# Altium PCB Keo_truot_cua_tu_6_sensor_2_PCB.PcbDoc
Units mil, origin at the board's own origin, x right, y up, seen from the top; angles counter-clockwise.
Board outline 2118.11 x 1291.34 mil, 2 copper layers (Top Layer, Bottom Layer); 41 components, 42 nets, 169 pads, 62 vias.
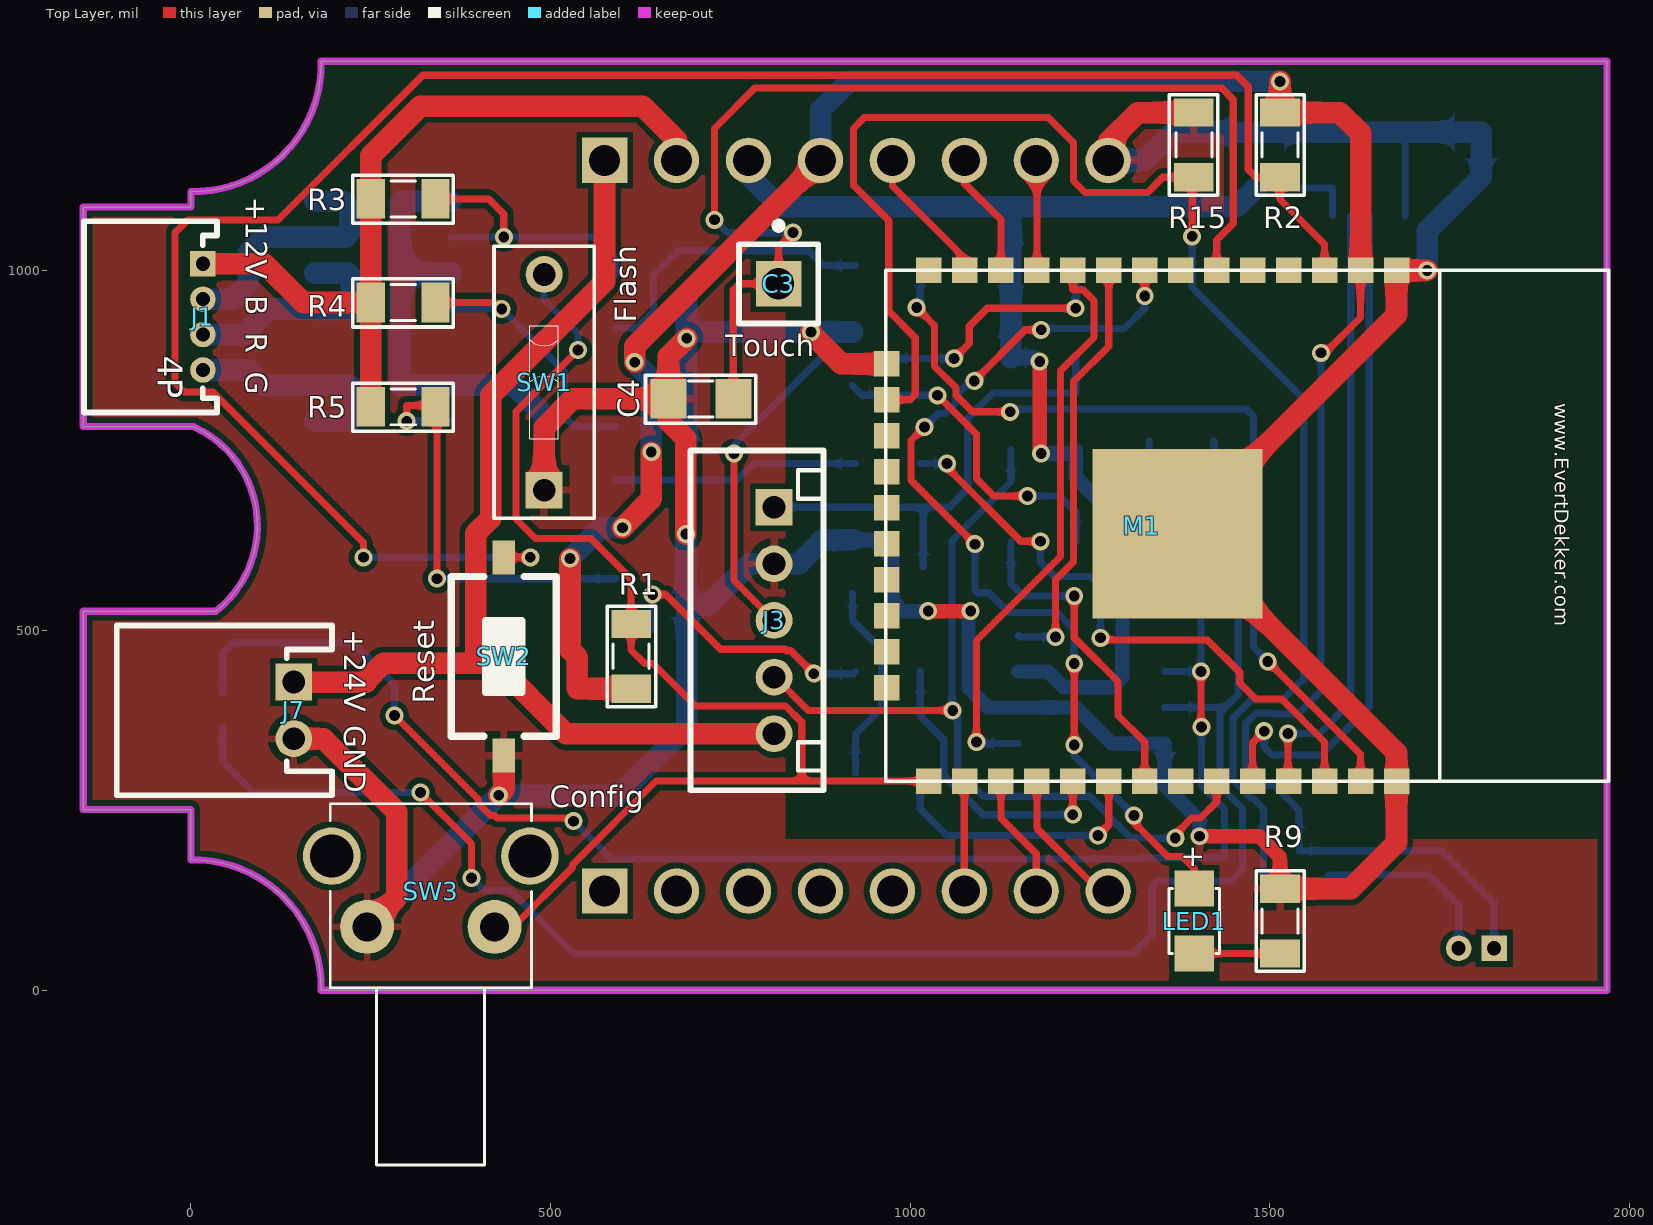
[diagram p0: Top Layer view]
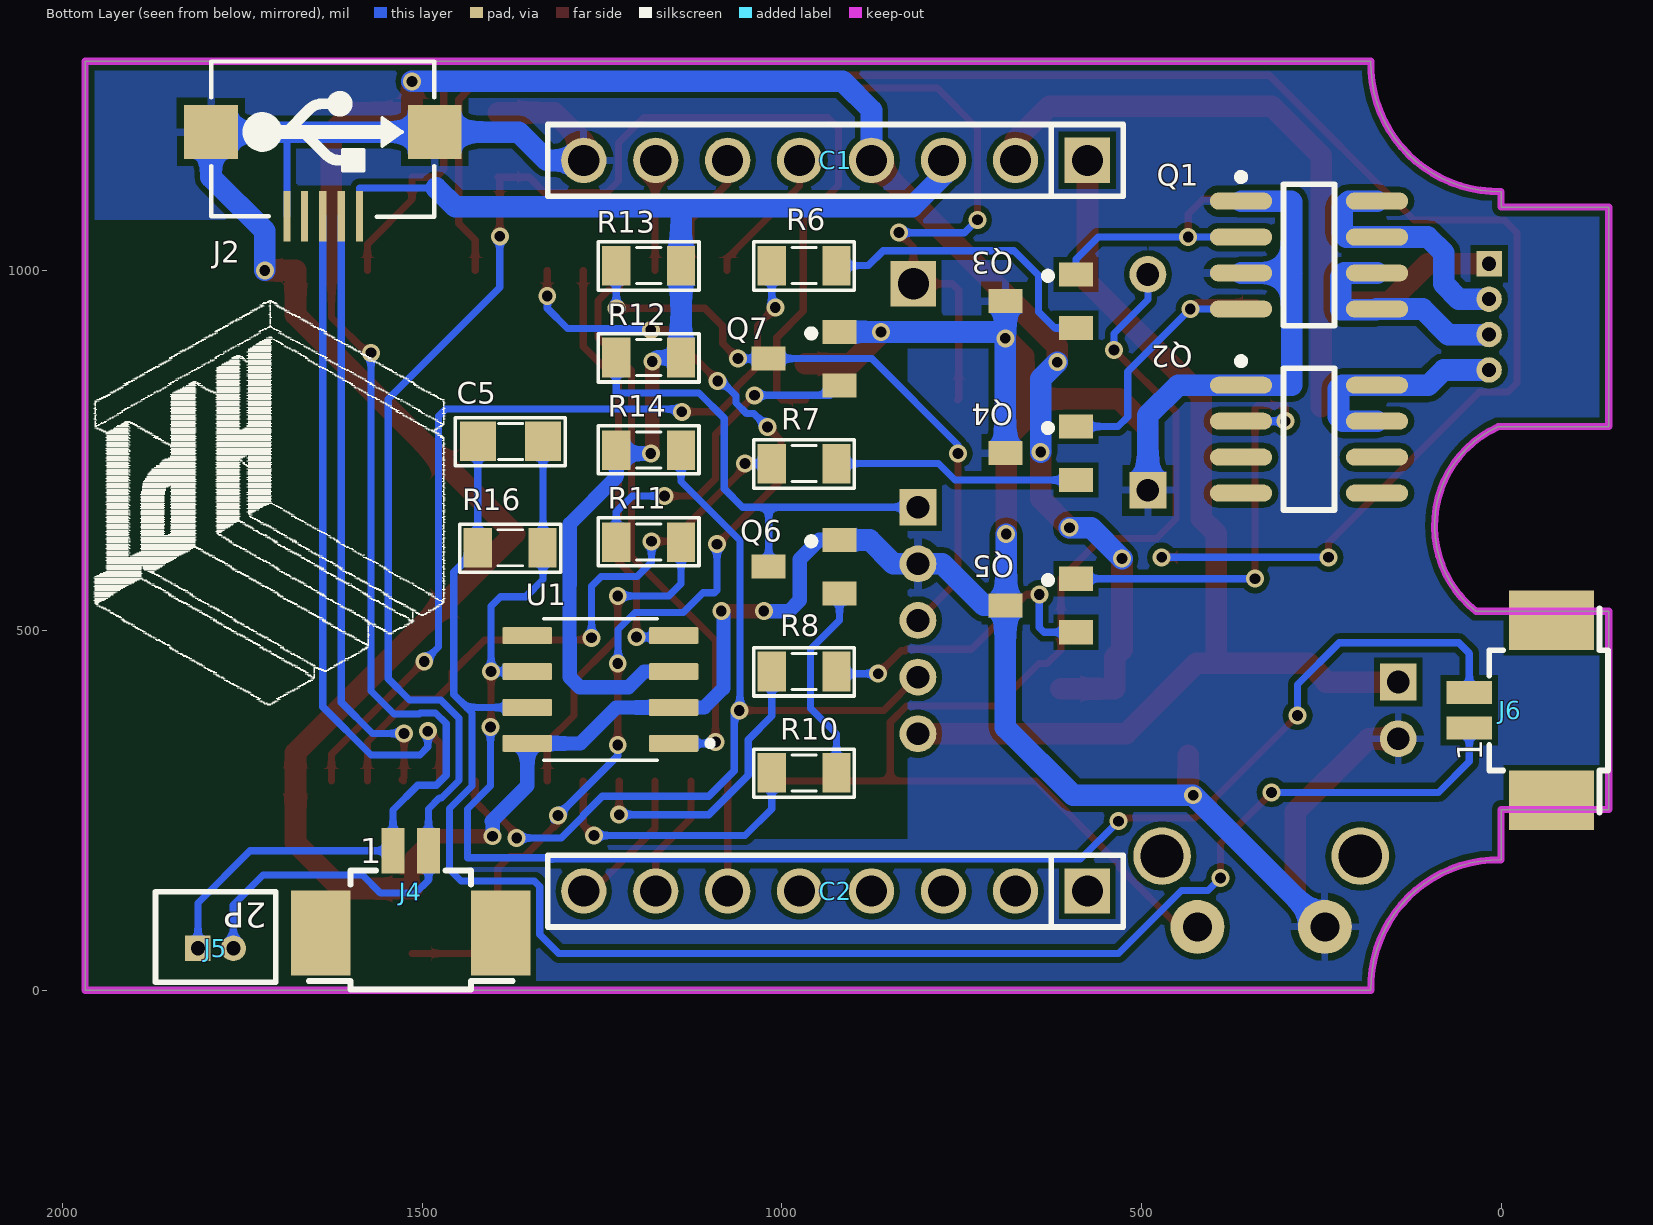
[diagram p1: Bottom Layer view, seen from below]
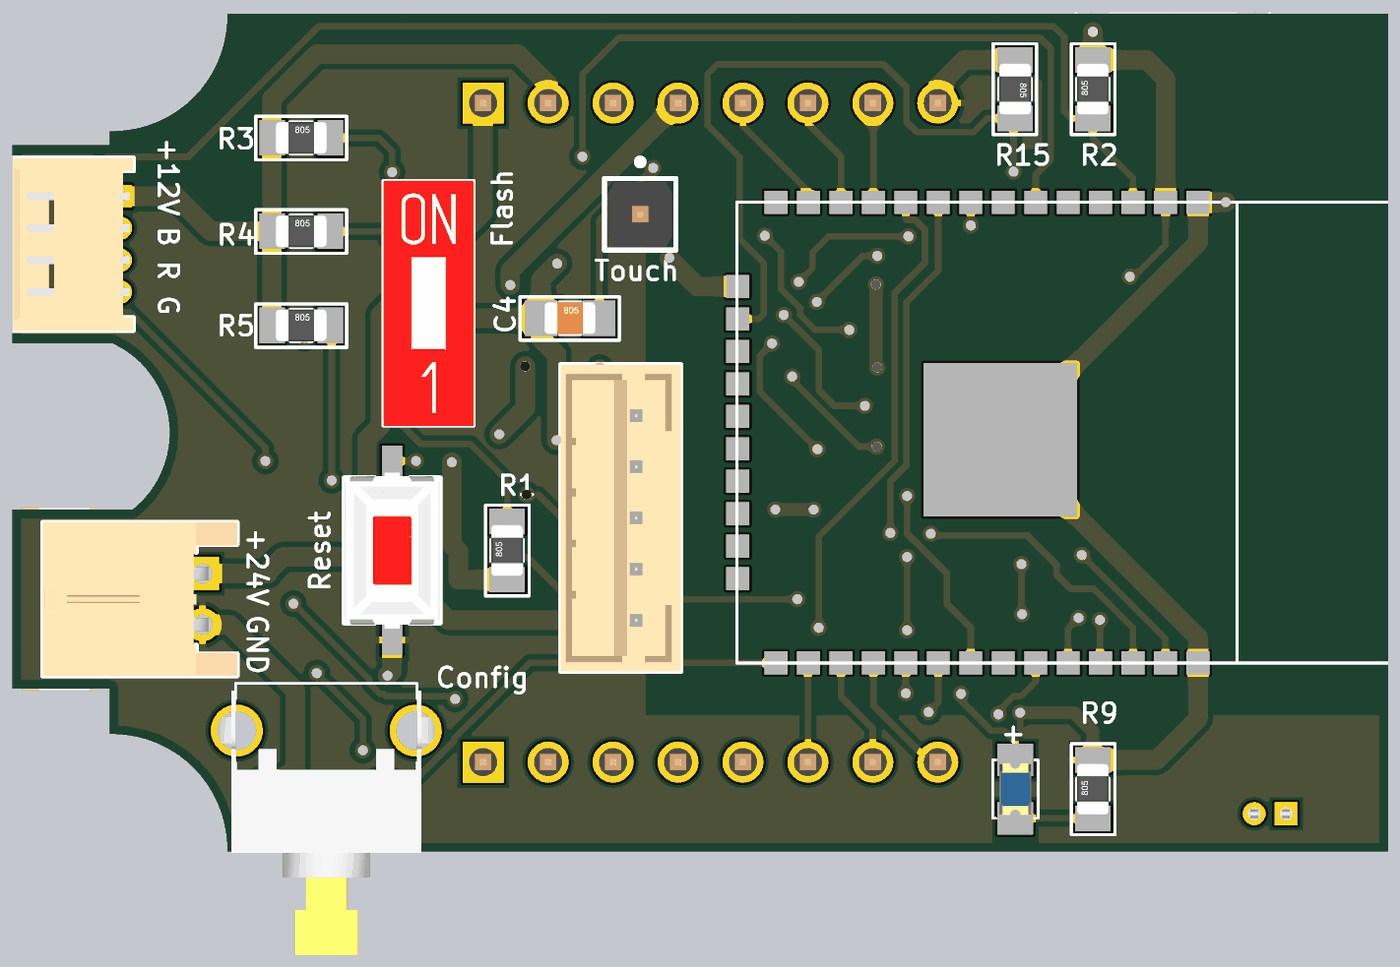
[diagram p2: 3D render of the assembled board from above, using the file's embedded part models]
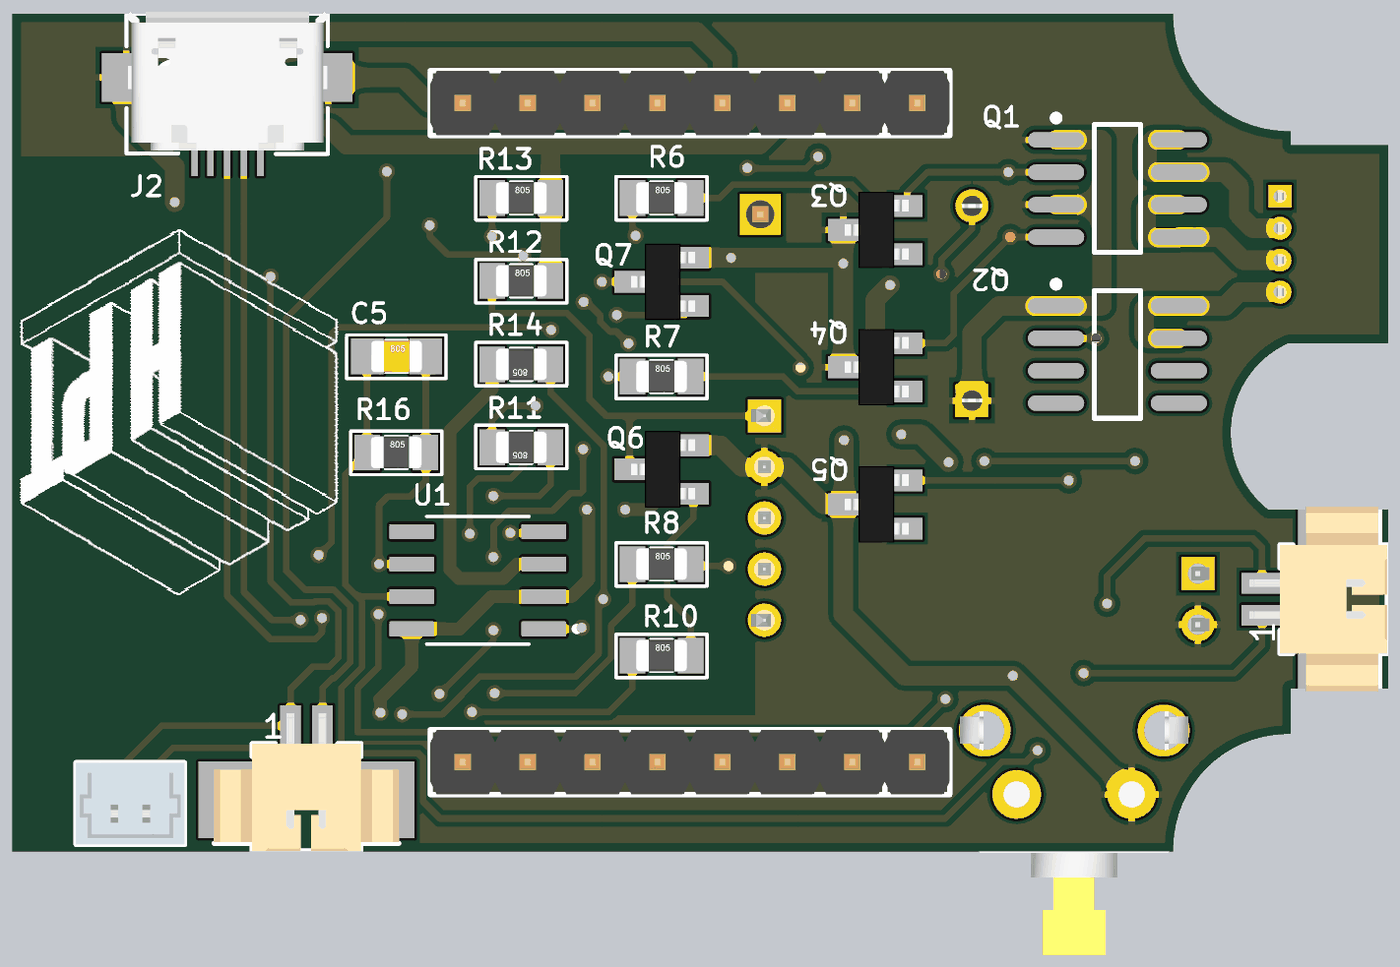
[diagram p3: 3D render of the assembled board from below, using the file's embedded part models]

## Layer stack, top to bottom
Top Solder: solder mask 0.4, Solder Resist, Dk 3.5
Top Layer: signal copper 1.4
Dielectric 1: dielectric 12.6, FR-4, Dk 4.8
Bottom Layer: signal copper 1.4
Bottom Solder: solder mask 0.4, Solder Resist, Dk 3.5

## Board outline
-149.61,251.18 -149.61,526.77 34.96,526.77 ccw(c-59.05,645.67) 4.09,783.47 -149.61,783.47 -149.61,1088.58 0,1088.58 0,1110.28 ccw(c3.94,1287.4) 181.06,1291.34 1968.51,1291.34 1968.51,0 181.06,0 ccw(c3.94,3.94) 0,181.06 0,251.18

## Design rules (kind name [scope] priority, off if disabled: settings)
Clearance [All] p1: gap=8
PolygonConnect [All] p1: connectstyle=Relief reliefconductorwidth=10 reliefentries=4 polygonreliefangle="90 Angle" airgapwidth=10
RoomDefinition Keo_truot_cua_tu_6_sensor_2_Schematic [InComponentClass('Keo_truot_cua_tu_6_sensor_2_Schematic')] p1: confinementstyle=ConfineIn formatcopy=TRUE lockcomponents=FALSE outline 2013.76,56.12 4250.76,56.12 4250.76,1215.12 2013.76,1215.12
RoutingVias [All] p1: holewidth=15 width=25 viastyle="Through Hole" minholewidth=15 minwidth=25 maxholewidth=28 maxwidth=50
SolderMaskExpansion [All] p1: expansion=4
Width [All] p1: maxlimit=80 minlimit=8 preferedwidth=10
30 further rules are at their usual default settings.

## Components (designator, comment, footprint, x,y, rotation, side; value= is the part's Value field where it differs from the comment)
C1 "JP8" JP8-D1T 575.2,1153.54 r0 bottom
C2 "JP8" JP8-D1T 575.2,137.8 r0 bottom
C3 "JP1" JP1-D1T 817,982 r0 top
C4 "104" SM-CAP-0805 664,822 r0 top
C5 "104" SM-CAP-0805 1422,763 r180 bottom
J1 "653004117322" 653004117322 -56.15,936.02 r270 top
J2 "USB-5" USB-M1 1638,1076.05 r180 bottom
J3 "62000511622" 62000511622 787,514 r90 top
J4 "653102131822" 653102131822 1515.75,83.62 r180 bottom
J5 "653002114822" 653002114822 1787,74 r0 bottom
J6 "653102131822" 653102131822 -65.98,388.98 r90 bottom
J7 "62000211722" 62000211722 46.61,388.98 r270 top
LED1 "LED blue" LED-0805-Blue 1394.76,141.12 r270 top
M1 "ESP32S_Module" ESP32S 966,1000.67 r270 top
Q1 "IRF7311" SO-8_N 267,1022 r180 bottom
Q2 "IRF7311" SO-8_N 267,766 r180 bottom
Q3 "A1015" SOT23B 640,958 r90 bottom
Q4 "A1015" SOT23B 640,746.5 r90 bottom
Q5 "A1015" SOT23B 640,535 r90 bottom
Q6 "C1815" SOT23B 969,589 r90 bottom
Q7 "C1815" SOT23B 969,878 r90 bottom
R1 "10K" RES-SMD-0805 612,464 r90 top
R2 "10K" RES-SMD-0805 1514,1175 r90 top
R3 "10K" RES-SMD-0805 295,1100 r0 top
R4 "10K" RES-SMD-0805 295,956 r0 top
R5 "10K" RES-SMD-0805 295,811 r0 top
R6 "1K" RES-SMD-0805 969,1007.25 r180 bottom
R7 "1K" RES-SMD-0805 969,732 r180 bottom
R8 "1K" RES-SMD-0805 969,443 r180 bottom
R9 "1K" RES-SMD-0805 1514,96.12 r90 top
R10 "1K" RES-SMD-0805 969,302 r180 bottom
R11 "1K" RES-SMD-0805 1185,623 r0 bottom
R12 "10K" RES-SMD-0805 1185,879.5 r180 bottom
R13 "10K" RES-SMD-0805 1185,1007.25 r180 bottom
R14 "10K" RES-SMD-0805 1185,750.75 r0 bottom
R15 "10K" RES-SMD-0805 1394.26,1175 r270 top
R16 "60R" RES-SMD-0805 1377.5,615 r180 bottom
SW1 "Flash" SW-DIP1-1 491,845 r0 top
SW2 "Reset" SW1-SMD 435,464 r270 top
SW3 "Config" SW1-DIP 245,88 r0 top
U1 "TJA1040" SOIC127P600X175-8N 1252,418 r0 bottom

## Footprints (in the part's own frame and the unit in brackets; to place one, negate y for a bottom-side part, rotate by r counter-clockwise, add the part's x,y. Pads: shape width x height; smd on the part's side, far side on the other; paste and mask are expansions set on the pad)
62000211722 [mm] "2.00mm Male Horizontal Shrouded Header, 2p"
  rect 1.3x1.3 hole 0.8: 1(-1,2.45)
  round 1.3 hole 0.8: 2(1,2.45)
  silkscreen extent -3,-3.8 3,3.8, body extent -3,-3.8 3,3.8, height 4.85
62000511622 [mm] "2.00mm Male Vertical Shrouded Header, 5p"
  rect 1.3x1.3 hole 0.8: 1(4,-0.6)
  round 1.3 hole 0.8: 2(2,-0.6) 3(0,-0.6) 4(-2,-0.6) 5(-4,-0.6)
  silkscreen extent -6,-2.35 6,2.35, body extent -6,-2.35 6,2.35, height 6.15
653002114822 [mm] "1.25mm Male Vertical Shrouded Header, 2p"
  rect 0.9x0.9 hole 0.5: 1(0.625,0.4)
  round 0.9 hole 0.5: 2(-0.625,0.4)
  silkscreen extent -2.12,-1.6 2.12,1.6, body extent -2.13,-1.6 2.12,1.6, height 4.25
653004117322 [mm] "1.25mm Male Horizontal Shrouded Header, 4p"
  rect 0.9x0.9 hole 0.5: 1(-1.875,1.85)
  round 0.9 hole 0.5: 2(-0.625,1.85) 3(0.625,1.85) 4(1.875,1.85)
  silkscreen extent -3.37,-2.35 3.37,2.35, body extent -3.37,-2.35 3.37,2.35, height 3.55
653102131822 [mm] "1.25mm SMT Male Horizontal Shrouded Header, 2p"
  rect 0.81x1.6 smd: 1(-0.625,2.8) 2(0.625,2.8)
  rect 2.1x3 smd: M1(-3.175,-0.1) M2(3.175,-0.1)
  silkscreen extent -3.6,-2.1 3.61,2.1, body extent -3.63,-2.1 3.62,3.3, height 3.43
ESP32S [mm] "ESP32S-Module"
  rect 0.9x0.9 smd: 1(0,18.034) 2(0,16.764) 3(0,15.494) 4(0,14.224) 5(0,12.954) 6(0,11.684) 7(0,10.414) 8(0,9.144) 9(0,7.874) 10(0,6.604) 11(0,5.334) 12(0,4.064) 13(0,2.794) 14(0,1.524) 15(3.3,0.034) 16(4.57,0.034) 17(5.84,0.034) 18(7.11,0.034) 19(8.38,0.034) 20(9.65,0.034) 21(10.92,0.034) 22(12.19,0.034) 23(13.46,0.034) 24(14.73,0.034) 25(18.034,1.524) 26(18.034,2.794) 27(18.034,4.064) 28(18.034,5.334) 29(18.034,6.604) 30(18.034,7.874) 31(18.034,9.144) 32(18.034,10.414) 33(18.034,11.684) 34(18.034,12.954) 35(18.034,14.224) 36(18.034,15.494) 37(18.034,16.764) 38(18.034,18.034)
  rect 6x6 smd: 101(9.3,10.3)
  silkscreen extent 0,0 18.03,25.53, body extent 0,0 18.03,25.53, height 2
JP1-D1T [mm] "1pins, 1 row, straight, gold plating"
  rect 1.6x1.6 hole 1.1: 1(0,0)
  silkscreen extent -1.4,-1.4 1.4,2.17, body extent -1.27,-1.27 1.27,1.27, height 8.54
JP8-D1T [mm] "8 pins, 1 row, straight, gold plating"
  rect 1.6x1.6 hole 1.1: 1(0,0)
  round 1.6 hole 1.1: 2(2.54,0) 3(5.08,0) 4(7.62,0) 5(10.16,0) 6(12.7,0) 7(15.24,0) 8(17.78,0)
  silkscreen extent -1.27,-1.27 19.05,1.27, body extent -1.27,-1.27 19.05,1.27, height 8.54
LED-0805-Blue [mil]
  rect 50x55 smd: 1(0,0) 2(90,0)
  silkscreen extent 0,-35 90,35, body extent 5,-25 85,25, height 43
RES-SMD-0805 [mil]
  rect 39.37x55 smd: 1(-45,0) 2(45,0)
  silkscreen extent -70,-34 70,33, body extent -39,-25 39,25, height 31
SM-CAP-0805 [mil]
  rect 50x55 smd: 1(0,0) 2(90,0)
  silkscreen extent -32,-34 121,33, body extent 6,-25 84,25, height 31
SO-8_N [mm] "SOIC, 8-Leads, Body 4.9x3.9mm, Pitch 1.27mm, IPC Medium Density"
  oval 2.2x0.6 smd: 1(-2.4,1.905) 2(-2.4,0.635) 3(-2.4,-0.635) 4(-2.4,-1.905) 5(2.4,-1.905) 6(2.4,-0.635) 7(2.4,0.635) 8(2.4,1.905)
  silkscreen extent -2.53,-2.5 0.9,2.88, body extent -2,-2.5 2,2.5, height 1.75
SOIC127P600X175-8N [mm]
  rrect15% 1.75x0.59 smd: 1(-2.585,1.905) 2(-2.585,0.635) 3(-2.585,-0.635) 4(-2.585,-1.905) 5(2.585,-1.905) 6(2.585,-0.635) 7(2.585,0.635) 8(2.585,1.905)
  silkscreen extent -3.97,-2.5 2,2.5
SOT23B [mm] "SOT 23B"
  rect 0.85x1.2 smd: 1(0.94,-1.245) 2(0,1.25) 3(-0.95,-1.25)
  silkscreen extent 0.77,-0.38 1.02,-0.13, body extent -1.5,-1.3 1.5,1.2, height 1.06
SW1-DIP [mil]
  round 75 hole 40: 1(0,0) 2(177.17,0)
  round 80 hole 60: ""(-49.21,98.42) ""(226.38,98.42)
  silkscreen extent -51,-331 228,171, body extent -87,-398 265,160, height 283
SW1-SMD [mm]
  rect 1.2x0.8 smd: 1(-3.5,0) 2(3.5,0)
  silkscreen extent -2.82,-1.85 2.82,1.85, body extent -3.05,-1.85 3.05,1.85, height 2.5
SW-DIP1-1 [mm] "01p, 2.54mm Pitch, Horizontal, Box Type, THT, flat Actuator, red, without Tape, Tube"
  rect 1.3x1.3 hole 0.8: 1(0,-3.81)
  round 1.3 hole 0.8: 2(0,3.81)
  silkscreen extent -1.77,-4.8 1.77,4.8, body extent -1.77,-4.8 1.77,4.8, height 5.4
USB-M1 [mil]
  rect 10x70 smd: 1(51.18,0) 2(25.59,0) 3(0,0) 4(-25.59,0) 5(-50,0)
  rect 74.8x74.8 smd: 5(-155.51,116.84) 5(155.51,116.84)
  silkscreen extent -155,-1 155,215, body extent -157,5 158,218, height 107

## Part data
C1 C2 C3: "WR-PHD 2.54 mm Angled Socket Header"
C4 C5: library part CN
J1: "WR-WTB 1.25mm Male Horizontal Shrouded Header, 4p"
J3: "WR-WTB 2.00mm Male Vertical Shrouded Header, 5p"
J4 J6: "WR-WTB 1.25mm SMT Male Horizontal Shrouded Header, 2p"
J5: "WR-WTB 1.25mm Male Vertical Shrouded Header, 2p"
J7: "WR-WTB 2.00mm Male Horizontal Shrouded Header, 2p"
LED1: library part "LED SMD"
M1: "Esp-32S"
Q1 Q2: library part IRF7101, "HEXFET Power MOSFET"
Q3 Q4 Q5: "PNP 600mW, ECB"
Q6 Q7: "NPN 600mW, ECB"
R1 R2 R3 R4 R5 R6 R7 R8 R9 R10 R11 R12 R13 R14 R15 R16: library part Res-SMD, "Resistor"
SW1 SW2 SW3: library part SW2, "Switch button 2 pin"
U1: "1/1 Transceiver Half CANbus 8-SO"

## Via types
v1: diameter 25, hole 15, Top Layer to Bottom Layer, tented both sides, 62 vias

## Nets (pads, with @x,y where several pads share a name; then routed paths per layer and width w, separated by ;. In a path a pad name is that pad's centre, name@x,y a point inside that pad or via, vN(x,y) a via of type N, cw(c..) or ccw(c..) an arc to the next point about the centre after c; other vN are vias at no path point)
3.3V: C1.4 J4.1 J5.1 M1.2 R1.1 R2.2 | length 3399.7
  Top Layer w10: v1(1571,886) 1577,886 1626,935 M1.2
  Top Layer w30: v1(527,600) 527,473 537,463 537,419 R1.1 ; v1(600,643) 640,683 v1(640,748) ; v1(617,873) 617,895.35 C1.4 ; v1(1514,1263.34) R2.2 1597,1220 1626,1191 M1.2
  Bottom Layer w10: v1(1571,886) 1571,416 1539,384 1504.06,384 1502.56,385.5 1481.44,385.5 1466.5,370.56 1466.5,298.94 1480.44,285 1506,285 1540.35,250.65 J4.1 1739.14,193.86 1811.61,121.39 J5.1
  Bottom Layer w30: v1(527,600) 570,643 v1(600,643) ; v1(617,873) 640,850 v1(640,748) ; C1.4 875.2,1223.54 915,1263.34 v1(1514,1263.34)
5V: C1.3 J2.1 R12.2 R13.2 R14.2 U1.3 | length 1835.9
  Top Layer w20: v1(1180,874) 1180,748 v1(1182,746)
  Bottom Layer w10: 1480.18,1115.18 1586.82,1115.18 J2.1
  Bottom Layer w20: R12.2 1174.5,879.5 v1(1180,874) ; U1.3 1191,443 1213,421 1281,421 1294.82,434.82 1294.82,488.29 1295,488.47 1295,563.53 1294.82,563.71 1294.82,648.18 1230,713 R14.2 1225.25,746 v1(1182,746)
  Bottom Layer w30: C1.3 775.2,1132.8 819,1089 1134,1089 ; R12.2 R13.2 1140,1083 1134,1089 ; 1480.18,1115.18 1454,1089 1134,1089
12V: C1.2 J1.1 R3.1 R4.1 R5.1 | length 1106.2
  Top Layer w30: J1.1 102.16,1009.84 156,956 R4.1 ; R5.1 R4.1 ; C1.2 675.2,1181.8 628,1229 319,1229 250,1160 R3.1 R4.1
24V: C1.1 J3.5 J7.1 | length 1493.4
  Top Layer w30: J7.1 243.54,428.35 243.54,430.45 267.39,454.3 396.25,454.3 ; C1.1 575,1153.35 575,985 417,827 417,655.69 396.25,634.94 396.25,454.3 ; J3.5 521.48,356.52 423.7,454.3 396.25,454.3
ANALOG: J4.2 J5.2 M1.16 R15.2 | length 2505.1
  Top Layer w10: M1.16 999.75,820.75 1007,828 1007,907 970,944 970,1070 921,1119 921,1198 936,1213 1192,1213 1227,1178 1227,1125 1242.95,1109.05 1330.05,1109.05 1351,1130 R15.2 1392,1127.74 v1(1392,1048)
  Bottom Layer w10: v1(1392,1048) 1392,977 1547,822 1547,433 1517.5,403.5 1473.98,403.5 1448.5,378.02 1448.5,291.48 1472.98,267 1476,267 1491.14,251.86 J4.2 1491.14,152.86 1509,135 1558,135 1583,160 1721,160 1762.39,118.61 J5.2
FG: J3.4 M1.33 R14.1 | length 1211.5
  Top Layer w10: J3.4 811.91,435.26 858.17,389 v1(1059,389) ; v1(1368.5,211.5) 1375.44,211.5 1369.44,217.5 1391.44,239.5 1403.44,239.5 1426,262.07 M1.33
  Bottom Layer w10: R14.1 1140,707 1058,625 1058,390 v1(1059,389) 1066,382 1066,305 1101.5,269.5 1249.5,269.5 1276.5,242.5 1276.5,241.44 1306.44,211.5 v1(1368.5,211.5)
FR: M1.31 R11.1 | length 451
  Top Layer w10: v1(1228,548) 1228,490 1238.5,479.5 1238.56,479.5 1289,429.06 1289,382 1326,345 M1.31
  Bottom Layer w10: R11.1 1140,565 1157,548 v1(1228,548)
GND: C1.8 C4.1 J2.5 J3.2 J7.2 M1.1 M1.15 M1.38 M1.101 Q1.1 Q1.3 Q2.1 Q3.2 Q4.2 Q5.2 Q6.1 Q7.1 R9.2 R15.1 SW1.1 SW2.2 SW3.1 U1.2 U1.8 | length 6661
  Top Layer w20: v1(1025,527) v1(1084,527) ; v1(1402,214) 1485,214 1514,185 R9.2
  Top Layer w30: J7.2 184.39,349.61 286,248 286,129 SW3.1 ; v1(428,271) 435,278 SW2.2 ; SW1.1 491,782 531,822 C4.1 ; v1(688,634) 688,767 664,791 C4.1 ; v1(689.21,906.21) 664,881 C4.1 ; v1(862,915) 862,913 904.25,870.75 M1.15 ; C1.8 1275.2,1179.2 1316,1220 R15.1 ; R9.2 1612.12,141.12 1676,205 M1.38 1676,330.04 M1.101 1676,939.02 M1.1 v1(1718.67,1000.67)
  Bottom Layer w10: 1683,1192.89 1688,1187.89 J2.5@1688,1076.05
  Bottom Layer w20: Q6.1 948,626 975,599 975,542 990,527 v1(1025,527) ; v1(1084,527) 1081,524 1081,420 1108,393 U1.2 1230,393 1280,343 U1.8 1353.77,284.23 1403,235 1402,234 v1(1402,214)
  Bottom Layer w30: SW3.1 v1(428,271) 595,271 689.21,365.21 Q5.2 ; Q1.3 291,997 ; Q1.1 292,1097 291,1096 291,997 ; SW1.1 491,799 449,841 Q2.1 291,841 291,997 ; v1(688,634) 688,536.21 Q5.2 ; Q4.2 v1(689.21,906.21) ; Q3.2 v1(689.21,906.21) ; Q6.1 878,626 844.74,592.74 J3.2 776.74,592.74 719,535 Q5.2 ; Q7.1 v1(862,915) 698,915 v1(689.21,906.21) ; C1.8 1326.54,1153.54 1365.89,1192.89 1482.49,1192.89 1683,1192.89 1793.51,1192.89 1793.51,1130.51 1718.67,1055.67 v1(1718.67,1000.67)
LEDB: M1.37 R6.1 | length 1202.8
  Top Layer w10: v1(1009,949) 1033.9,924.1 1033.9,867.16 1063.5,837.56 1063.5,826.96 1086.46,804 v1(1139,804) ; v1(1497,457) 1626,328 M1.37
  Bottom Layer w10: v1(1009,949) 1014,954 R6.1 ; v1(1139,804) 1143,808 1467,808 1477,798 1477,477 v1(1497,457)
LEDG: M1.29 R8.1 | length 406.4
  Top Layer w10: v1(1226,244) M1.29
  Bottom Layer w10: R8.1 1014,381 1046.69,348.31 1046.69,298.86 1101.55,244 v1(1226,244)
LEDR: M1.36 R7.1 | length 851
  Top Layer w10: v1(1051,732) 1051,726.54 1153.54,624 v1(1181,624) ; v1(1264.32,489.81) 1267.12,487 1413,487 1458,442 1458,427 1480,405 1516,405 1576,345 M1.36
  Bottom Layer w10: R7.1 v1(1051,732) ; v1(1181,624) 1181,595 1201,575 1251,575 1264.32,561.68 v1(1264.32,489.81) v1@1262,487.49
NetC5_1: C5.1 J6.1 R16.1 U1.7 | length 2407.5
  Top Layer w10: v1(319,275) 390,204 v1(390,156)
  Bottom Layer w10: J6.1 44.25,317.75 87,275 v1(319,275) ; v1(390,156) 407.5,138.5 444.35,138.5 531.85,51 1310,51 1336.41,77.41 1336.41,144.12 1344.02,151.74 1445.74,151.74 1462,168 1462,252.53 1430.5,284.03 1430.5,385.47 1438.03,393 ; U1.7 1438.03,393 ; C5.1 1422.5,762.5 R16.1 1456,581.5 1456,410.97 1438.03,393
NetC5_2: C5.2 J6.2 R16.2 U1.6 | length 2300.7
  Top Layer w10: v1(283,382) 400,265 400,259.4 416.4,243 422,243 425.58,239.42 527.58,239.42 v1(532,235) ; v1(1404,443) 1404,366.81 v1(1405,365.81)
  Bottom Layer w10: J6.2 44.25,468.25 59,483 225,483 283,425 v1(283,382) ; v1(532,235) 584.71,182.29 1318.71,182.29 1319,182 1321,184 1437,184 1437,252.07 1405,284.07 v1(1405,365.81) ; C5.2 1332,571 1356,547 1391,547 1404,534 v1(1404,443) U1.6
NetJ1_2: J1.2 Q1.7 Q1.8 | length 355
  Bottom Layer w30: J1.2 58.63,960.63 80,982 80,1025 102,1047 Q1.7 215,1047 221,1053 221,1088 212,1097 Q1.8
NetJ1_3: J1.3 Q1.5 Q1.6 | length 320
  Bottom Layer w30: J1.3 73.42,911.42 109,947 Q1.5 173.51,946 223,946 223,992 218,997 Q1.6
NetJ1_4: J1.4 Q2.7 Q2.8 | length 315.1
  Bottom Layer w30: J1.4 79.79,862.21 101,841 Q2.8 221,841 226,836 226,797 220,791 Q2.7
NetJ3_1: J3.1 Q6.2 R12.1 | length 674.4
  Bottom Layer w10: J3.1 1018.21,671.48 ; Q6.2 1018.21,671.48 ; R12.1 1230,830 1115,830 1080,795 1080,697 1054.48,671.48 1018.21,671.48
NetJ3_3: J3.3 Q7.2 R13.1 | length 894
  Top Layer w10: v1(755,746) 755,569.62 J3.3 ; v1(1061,878) 1082,899 1082,923 1107,948 v1(1230,948)
  Bottom Layer w10: v1(755,746) 755,758 875,878 Q7.2 v1(1061,878) ; v1(1230,948) R13.1
NetLED1_1: LED1.1 M1.8 | length 1314.7
  Top Layer w10: v1(1020,783) 1001,764 1001,709 v1(1090,620) ; v1(1089,847) 1160,918 v1(1182,918) ; v1(1228,341) v1(1228,454) ; v1(1311,243) 1311,232.94 1357.94,186 1378,186 1394.76,169.24 LED1.1 ; v1(1326,965) M1.8
  Bottom Layer w10: v1(1020,783) 1038.5,801.5 1048.56,801.5 1063.5,816.44 1063.5,826.5 1084,847 v1(1089,847) ; v1(1090,620) 1090,556 1093.5,552.5 1109.5,552.5 1137,525 1204.06,525 1227.5,501.56 1227.5,454.5 v1(1228,454) ; v1(1182,918) 1184,920 1298,920 1326,948 v1(1326,965) ; v1(1228,341) 1228,326 v1@1317,237
NetLED1_2: LED1.2 R9.1 | length 119.2
  Top Layer w10: LED1.2 R9.1
NetM1_3: M1.3 R2.1 SW2.1 | length 2759.9
  Top Layer w10: v1@240,601.8 240,622 30.51,831.49 -9.49,831.49 -22,844 -22,1053 -4.42,1070.58 120.99,1070.58 322.4,1272 1454,1272 1470,1256 1470,1141 1481,1130 R2.1 1514,1099 1576,1037 M1.3 ; SW2.1 v1(471.8,601.8)
  Bottom Layer w10: v1(239.8,601.8) v1(471.8,601.8)
NetM1_25: M1.25 R1.2 SW1.2 SW3.2 | length 1739.2
  Top Layer w10: SW3.2 447.91,88 530.7,170.8 530.7,174.68 646.7,290.67 849.21,290.67 ; v1(538,890) 452,804 452,655 479,628 556,628 612,572 R1.2 612,473 631,454 642.57,454 701.46,395.11 826.61,395.11 849.21,372.5 849.21,290.67 ; M1.25 849.21,290.67
  Bottom Layer w10: SW1.2 491,960 538,913 v1(538,890)
NetQ1_2: Q1.2 Q3.1 R3.2 | length 399.1
  Top Layer w10: R3.2 414,1100 435,1079 v1(435,1047)
  Bottom Layer w10: Q1.2 v1(435,1047) 560,1047 591,1016 Q3.1
NetQ1_4: Q1.4 Q4.1 R4.2 | length 429.9
  Top Layer w10: R4.2 423,956 v1(432,947)
  Bottom Layer w10: Q1.4 v1(432,947) 519,860 519,797 532.5,783.5 Q4.1
NetQ2_2: Q2.2 Q5.1 R5.2 | length 613.1
  Top Layer w10: v1(300,791) 300,813 338,813 R5.2 342,809 v1(342,572)
  Bottom Layer w10: v1(300,791) Q2.2 ; v1(342,572) Q5.1
NetQ3_3: Q3.3 R6.2 | length 416.2
  Bottom Layer w10: Q3.3 620.6,920.6 643,943 643,994 677,1028 859,1028 879.75,1007.25 R6.2
NetQ4_3: Q4.3 R7.2 | length 342.7
  Bottom Layer w10: Q4.3 759.1,709.1 782,732 R7.2
NetQ5_3: Q5.3 R8.2 | length 428.6
  Top Layer w10: v1(642,550) 660,550 736.15,473.85 826.61,473.85 828.46,472 834,472 v1(866,440)
  Bottom Layer w10: Q5.3 635.4,497.6 642,504.2 v1(642,550) ; v1(866,440) 921,440 R8.2
NetQ6_3: Q6.3 R10.2 | length 281.2
  Bottom Layer w10: Q6.3 919.79,514.21 960,474 960,392 924,356 R10.2
NetQ7_3: Q7.3 R11.2 | length 461.3
  Top Layer w10: v1(1038,827) 1092,773 1092,711 1116,687 v1(1163,687)
  Bottom Layer w10: Q7.3 933.39,827 v1(1038,827) ; v1(1163,687) 1208,687 1230,665 R11.2
O1: C1.5 M1.13 | length 194.6
  Top Layer w10: C1.5 975.2,1117.8 1076,1017 M1.13
O2: C1.6 M1.12 | length 173.9
  Top Layer w10: C1.6 1075.2,1121.8 1126,1071 M1.12
O3: C1.7 M1.11 | length 153.2
  Top Layer w10: C1.7 1176,1152.74 M1.11
O4: C2.6 M1.26 | length 153.2
  Top Layer w10: C2.6 1075.2,289.86 M1.26
O5: C2.7 M1.27 | length 173.3
  Top Layer w10: M1.27 1126,239 1175.2,189.8 C2.7
O6: C2.8 M1.28 | length 201
  Top Layer w10: M1.28 1176,225 1263.2,137.8 C2.8
PWM: M1.30 R10.1 | length 394.2
  Top Layer w10: v1(1261,215) 1276,230 M1.30
  Bottom Layer w10: R10.1 1014,252.01 1051.01,215 v1(1261,215)
RX: J2.2 M1.35 | length 849.4
  Top Layer w10: v1(1525,357) 1525,295.67 1528,292.67 M1.35
  Bottom Layer w10: v1(1525,357) 1569,357 1612.41,400.41 J2.2
RXCAN: M1.9 U1.4 | length 592.9
  Top Layer w10: v1(1202,491) 1202,570.54 1227,595.54 1227,846 1276,895 M1.9
  Bottom Layer w10: U1.4 1152.23,491 v1(1202,491)
T4: C3.1 C4.2 M1.6 | length 1541.3
  Top Layer w10: v1(728,1071) 728,1198 784,1254 1433,1254 1449,1238 1449,1066 1426,1043 M1.6 ; C4.2@755.25,820.75 C4.2 754,973 763,982 C3.1 817,1033 837.5,1053.5 v1(837,1053.5)
  Bottom Layer w10: v1(728,1071) 746,1053 836.5,1053 v1(837,1053.5)
TX: J2.3 M1.34 | length 958.4
  Top Layer w10: M1.34@1476,290.67 1476,344 v1(1492,360)
  Bottom Layer w10: v1(1492,360) 1492,337.93 1502.93,327 1571,327 1638,394 J2.3
TXCAN: M1.10 U1.1 | length 809.6
  Top Layer w10: v1@1092,338 v1(1092,345) 1092,486 1209,603 1209,861 1255.5,907.5 1255.5,958.56 1240.56,973.5 1227.01,973.5 1226,974.5 M1.10
  Bottom Layer w10: v1(1092,345) 1094,343 U1.1
pads on no net: C2.1 C2.2 C2.3 C2.4 C2.5 J2.4 J4.M1 J4.M2 J6.M1 J6.M2 M1.4 M1.5 M1.7 M1.14 M1.17 M1.18 M1.19 M1.20 M1.21 M1.22 M1.23 M1.24 M1.32 Q2.3 Q2.4 Q2.5 Q2.6 SW3. U1.5

## Polygon pours and split planes (outlines as drawn)
GND on Top Layer "Top Layer-No Net" (solid, remove dead copper, pour order 0): 181.06,1291.34 -149.61,1291.34 -149.61,251.18 -149.61,0 1968.51,0 1968.51,210 826,210 826,1083 1968.51,1083 1968.51,1291.34
GND on Bottom Layer "Top Layer-No Net" (solid, remove dead copper, pour order 2): -149.61,1088.58 -149.61,0 1968.51,0 1968.51,210 825,210 825,1071 1968,1071 1968,1291.34 181.06,1291.34

## Keep-outs
Keep-Out Layer:
  the board outline again, w10

## Silkscreen, mask and mechanical layers (free items; w line width, h text height)
Top Overlay:
  text "+12V" at 76,1103 h30 r270
  text "B" at 76,966 h30 r270
  text "R" at 76,914 h30 r270
  text "Touch" at 743,881 h30
  text "G" at 76,860 h30 r270
  text "+24V" at 213,502 h30 r270
  text "GND" at 213,368 h30 r270
  text "+" at 1380,202 h30 r270
Bottom Overlay:
  drawing of 2330 lines, arcs and shapes, not listed

## Text inside footprints (layer, text, board x,y; h text height)
J1: Top Overlay "4P" at -46.31,881.89 h35 r270
J4: Bottom Overlay "1" at 1586.61,176.14 h35
J5: Bottom Overlay "2P" at 1716.13,121.24 h35 r180
J6: Bottom Overlay "1" at 26.54,318.11 h35 r270
M1: Top Overlay "www.EvertDekker.com" at 1896,815.67 h19.68 r270